# Altium PCB BMS PCB.PcbDoc (part 2 of 2)
Units mm, origin at the board's own origin, x right, y up, seen from the top; angles counter-clockwise.
Board outline 90 x 100 mm, 4 copper layers (Top Layer, Layer 1, Layer 2, Bottom Layer), stack 0.603 mm thick; 82 components, 43 nets, 216 pads, 71 vias.
Unrouted connection lines stored in the file: 2.
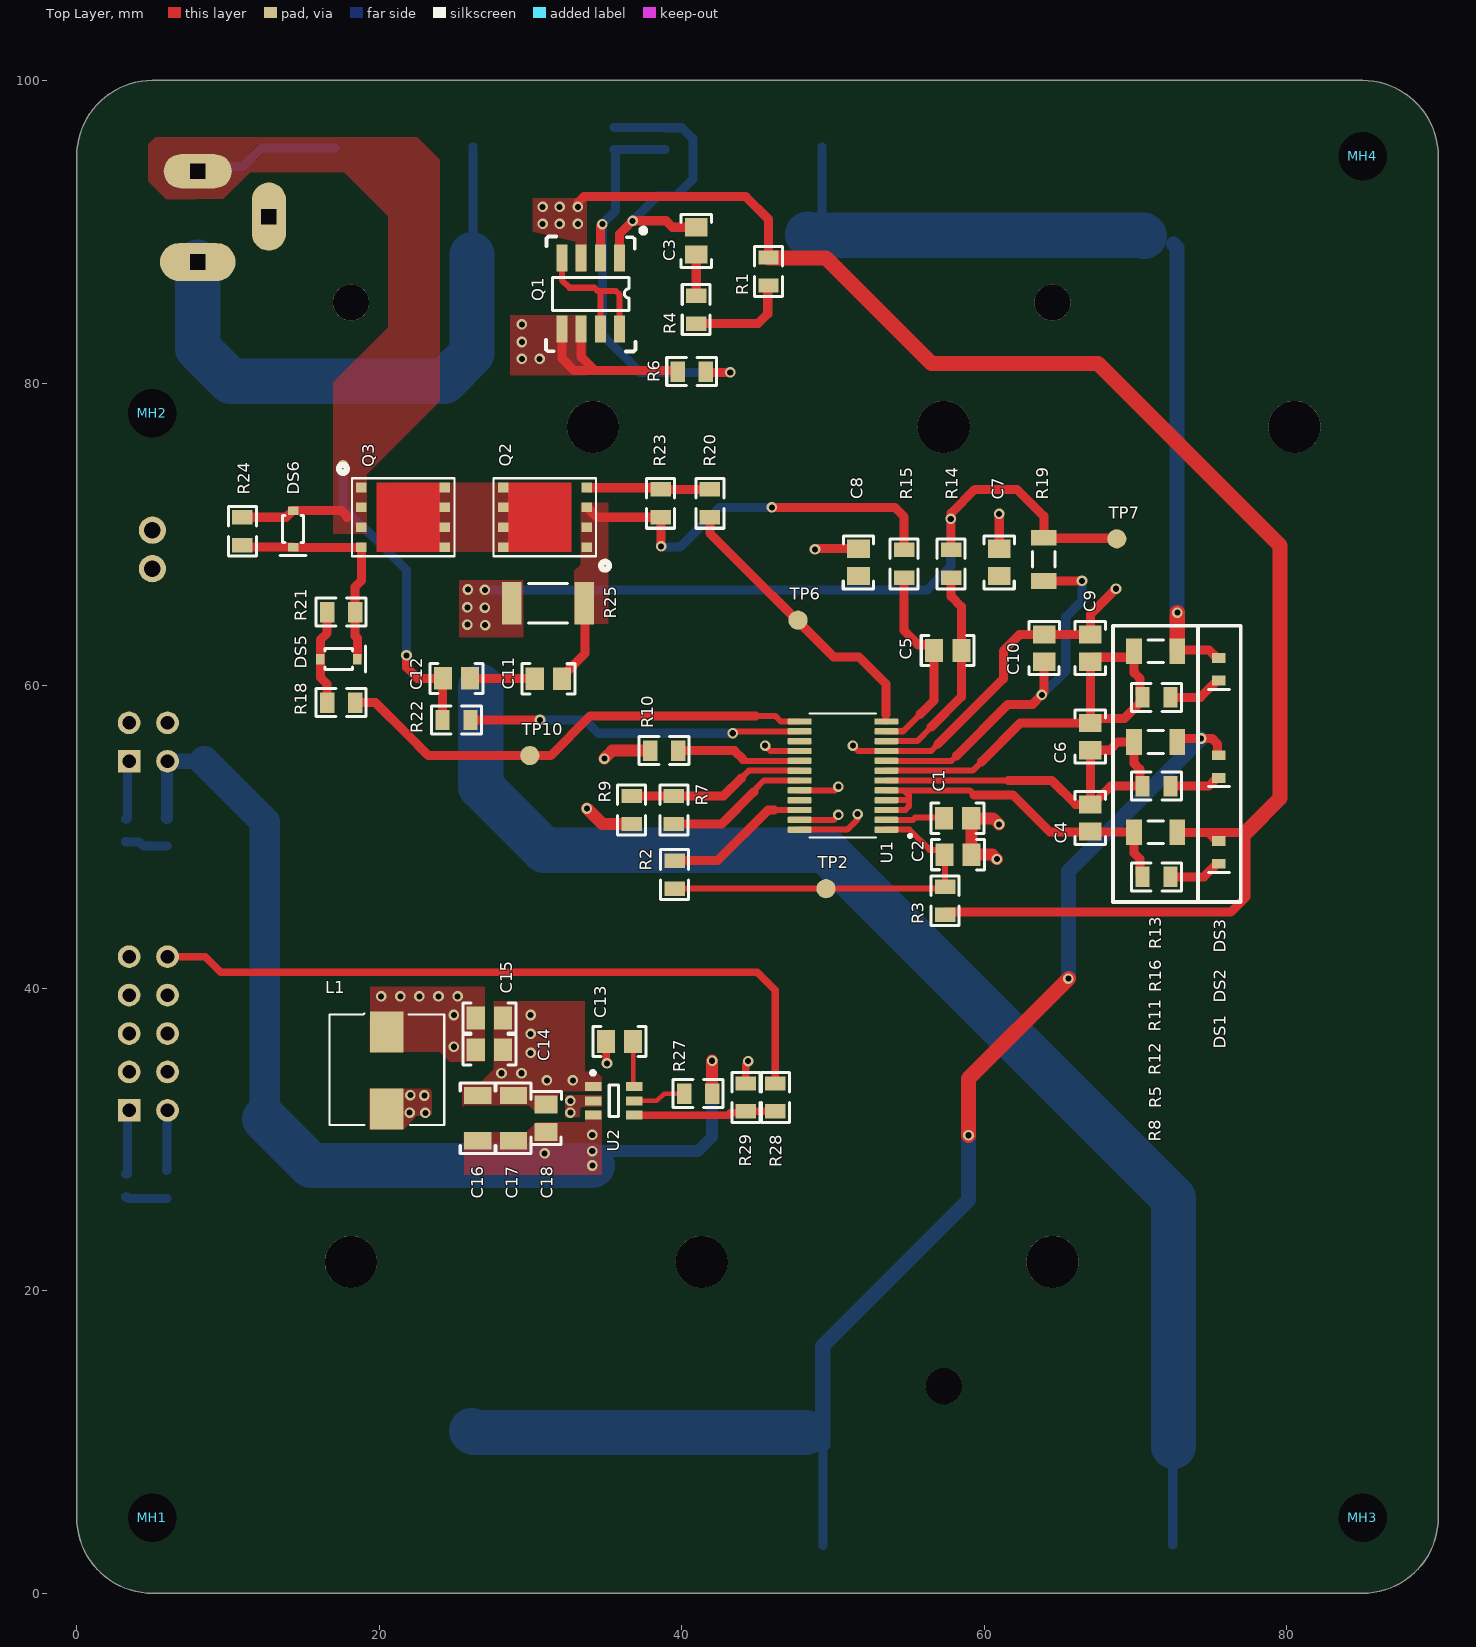
[diagram p0: Top Layer view]

## Part data (continued)
R14 R15: library part RES_100R_1/8W_1%_0805, "SMD Chip Resistor, 100 Ohm, ± 1%, 125 mW, 0805 [2012 Metric], Thick Film, General Purpose", Case Code (Imperial)=0805, Case Code (Metric)=2012, Manufacturer 1=Yageo, Manufacturer Part Number 1=RC0805FR-07100RL, Max Operating Temperature=155°C, Min Operating Temperature=-55°C, Package Quantity=5000, Power Rating=125mW, Supplier Part Number 1=311-100CRCT-ND, Temperature Coefficient=100ppm/°C, Tolerance=1%, Voltage Rating=150V, Application(s)="HIGH RELIABILITY", Category="Chip SMD Resistors", ComponentLink1Description=https://datasheet.ciiva.com/11808/0900766b8106beab-11808877.pdf?src-supplier=Rs, ComponentLink1URL=https://datasheet.ciiva.com/11808/0900766b8106beab-11808877.pdf?src-supplier=Rs, ComponentLink2Description=https://datasheet.ciiva.com/7941/1697719-7941680.pdf?src-supplier=Element14, ComponentLink2URL=https://datasheet.ciiva.com/7941/1697719-7941680.pdf?src-supplier=Element14, ComponentLink3Description=https://datasheet.ciiva.com/7941/1686128-7941679.pdf?src-supplier=Element14, ComponentLink3URL=https://datasheet.ciiva.com/7941/1686128-7941679.pdf?src-supplier=Element14, ComponentLink4Description=https://datasheet.ciiva.com/7660/38627-7660797.pdf?src-supplier=Element14, ComponentLink4URL=https://datasheet.ciiva.com/7660/38627-7660797.pdf?src-supplier=Element14, ComponentLink5Description=https://datasheet.ciiva.com/22747/444164-22747535.pdf?src-supplier=Element14, ComponentLink5URL=https://datasheet.ciiva.com/22747/444164-22747535.pdf?src-supplier=Element14, ComponentLink6Description=https://datasheet.ciiva.com/46447/444164-46447562.pdf?src-supplier=Element14, ComponentLink6URL=https://datasheet.ciiva.com/46447/444164-46447562.pdf?src-supplier=Element14, ComponentLink7Description=https://datasheet.ciiva.com/2456/pyu-r-int-thick-7-2456988.pdf?src-supplier=Digi-Key, ComponentLink7URL=https://datasheet.ciiva.com/2456/pyu-r-int-thick-7-2456988.pdf?src-supplier=Digi-Key, ComponentLink8Description=https://datasheet.ciiva.com/2456/pyu-r-int-thick-7-2456989.pdf?src-supplier=Digi-Key, ComponentLink8URL=https://datasheet.ciiva.com/2456/pyu-r-int-thick-7-2456989.pdf?src-supplier=Digi-Key, ComponentLink9Description=https://datasheet.ciiva.com/2456/pyu-r-int-thick-7-2456987.pdf?src-supplier=Digi-Key, ComponentLink9URL=https://datasheet.ciiva.com/2456/pyu-r-int-thick-7-2456987.pdf?src-supplier=Digi-Key, ComponentLink10Description=https://datasheet.ciiva.com/17082/rc0805-17082697.pdf?src-supplier=Future+Electronics, ComponentLink10URL=https://datasheet.ciiva.com/17082/rc0805-17082697.pdf?src-supplier=Future+Electronics, Height=0.5mm, Lead Free="Lead Free", Length=2mm, Packaging="Cut Tape", Pricing 1="1=0.1, 10=0.024, 50=0.0152, 100=0.0127, 500=0.00866, 1000=0.00748 (USD)", Reach SVHC Compliant=4187SVHC, Resistance=100R, RoHS=Yes, RoHS Compliant=Yes, Series=RC, Stock 1=1802567, Supplier 1=Digi-Key, Technology="THICK FILM", Termination=SMD/SMT, Type="General Purpose", Voltage Rating (AC)=150V, Weight=0.000917oz, Width=1.25mm
R18 R20: library part RES_5.1K_1/8W_1%_0805, "SMD Chip Resistor, 5.1 kOhm, ± 1%, 125 mW, 0805 [2012 Metric], Thick Film, General Purpose", Case Code (Imperial)=0805, Case Code (Metric)=2012, Manufacturer 1=Yageo, Manufacturer Part Number 1=RC0805FR-075K1L, Max Operating Temperature=155°C, Max Power Dissipation=125mW, Min Operating Temperature=-55°C, Package Quantity=1, Resistance=5.1kR, Supplier Part Number 1=311-5.10KCRCT-ND, Temperature Coefficient=100ppm/°C, Tolerance=1%, Voltage Rating=150V, Case/Package=0805, Category="Chip SMD Resistors", ComponentLink1Description=https://datasheet.ciiva.com/11808/0900766b8106beab-11808171.pdf?src-supplier=Rs, ComponentLink1URL=https://datasheet.ciiva.com/11808/0900766b8106beab-11808171.pdf?src-supplier=Rs, ComponentLink2Description=https://datasheet.ciiva.com/2456/pyu-r-int-thick-7-2456979.pdf?src-supplier=Digi-Key, ComponentLink2URL=https://datasheet.ciiva.com/2456/pyu-r-int-thick-7-2456979.pdf?src-supplier=Digi-Key, ComponentLink3Description=https://datasheet.ciiva.com/2456/pyu-r-int-thick-7-2456980.pdf?src-supplier=Digi-Key, ComponentLink3URL=https://datasheet.ciiva.com/2456/pyu-r-int-thick-7-2456980.pdf?src-supplier=Digi-Key, ComponentLink4Description=https://datasheet.ciiva.com/2456/pyu-r-int-thick-7-2456978.pdf?src-supplier=Digi-Key, ComponentLink4URL=https://datasheet.ciiva.com/2456/pyu-r-int-thick-7-2456978.pdf?src-supplier=Digi-Key, ComponentLink5Description=https://datasheet.ciiva.com/5558/rc0805-5558152.pdf?src-supplier=Mouser, ComponentLink5URL=https://datasheet.ciiva.com/5558/rc0805-5558152.pdf?src-supplier=Mouser, Construction=Rectangular, Depth=1.25mm, Features="Moisture Resistant", Height=0.024inch, Lead Free="Lead Free", Length=0.079inch, Military Standard=Not, Mount="Surface Mount", Number of Terminations=2, Packaging="Tape and Reel", Power Rating=125mW, Pricing 1="1=0.1, 10=0.024, 50=0.0152, 100=0.0127, 500=0.00866, 1000=0.00748 (USD)", RoHS=Yes, RoHS Compliant=Yes, Series=RC, Stock 1=497934, Supplier 1=Digi-Key, Technology="THICK FILM", Termination=SMD/SMT, Voltage Rating (DC)=150V, Width=0.049inch
R21: library part RES_1M_1/8W_1%_0805, "SMD Chip Resistor, 1 MOhm, ± 1%, 125 mW, 0805 [2012 Metric], Thick Film, General Purpose", Manufacturer 1=Yageo, Manufacturer Part Number 1=RC0805FR-131ML, Supplier Part Number 1=13-RC0805FR-131MLCT-ND, Category="Chip SMD Resistors", ComponentLink1Description=https://datasheet.ciiva.com/17332/rc0805-17332618.pdf?src-supplier=Future+Electronics, ComponentLink1URL=https://datasheet.ciiva.com/17332/rc0805-17332618.pdf?src-supplier=Future+Electronics, ComponentLink2Description=https://datasheet.ciiva.com/12560/rc0805-257173-12560472.pdf?src-supplier=Mouser, ComponentLink2URL=https://datasheet.ciiva.com/12560/rc0805-257173-12560472.pdf?src-supplier=Mouser, Pricing 1="1=0.1, 10=0.024, 50=0.0152, 100=0.0127, 500=0.00866, 1000=0.00748, 5000=0.00548, 10000=0.00486 (USD)", RoHS=Yes, Stock 1=50925, Supplier 1=Digi-Key
R22: library part RES_470K_1/8W_5%_0805, "SMD Chip Resistor, 470 kOhm, ± 5%, 125 mW, 0805 [2012 Metric], Thick Film, General Purpose", Manufacturer 1=Yageo, Manufacturer Part Number 1=RC0805JR-07470KL, Supplier Part Number 1=311-470KARCT-ND, Voltage Rating (AC)=150V, Category="Chip SMD Resistors", ComponentLink1Description=https://datasheet.ciiva.com/7941/442941-7941963.pdf?src-supplier=Element14, ComponentLink1URL=https://datasheet.ciiva.com/7941/442941-7941963.pdf?src-supplier=Element14, ComponentLink2Description=https://datasheet.ciiva.com/7941/442941-7941964.pdf?src-supplier=Element14, ComponentLink2URL=https://datasheet.ciiva.com/7941/442941-7941964.pdf?src-supplier=Element14, ComponentLink3Description=https://datasheet.ciiva.com/16747/rc0805-16747222.pdf?src-supplier=Future+Electronics, ComponentLink3URL=https://datasheet.ciiva.com/16747/rc0805-16747222.pdf?src-supplier=Future+Electronics, ComponentLink4Description=https://datasheet.ciiva.com/15190/getdatasheetpartid-323887-15190053.pdf?src-supplier=Verical, ComponentLink4URL=https://datasheet.ciiva.com/15190/getdatasheetpartid-323887-15190053.pdf?src-supplier=Verical, ComponentLink5Description=https://datasheet.ciiva.com/2456/pyu-r-int-thick-7-2456113.pdf?src-supplier=Digi-Key, ComponentLink5URL=https://datasheet.ciiva.com/2456/pyu-r-int-thick-7-2456113.pdf?src-supplier=Digi-Key, ComponentLink6Description=https://datasheet.ciiva.com/2456/pyu-r-int-thick-7-2456114.pdf?src-supplier=Digi-Key, ComponentLink6URL=https://datasheet.ciiva.com/2456/pyu-r-int-thick-7-2456114.pdf?src-supplier=Digi-Key, ComponentLink7Description=https://datasheet.ciiva.com/2456/pyu-r-int-thick-7-2456115.pdf?src-supplier=Digi-Key, ComponentLink7URL=https://datasheet.ciiva.com/2456/pyu-r-int-thick-7-2456115.pdf?src-supplier=Digi-Key, Pricing 1="1=0.1, 10=0.022, 50=0.0136, 100=0.0114, 500=0.00778, 1000=0.00671 (USD)", RoHS=Yes, Stock 1=141801, Supplier 1=Digi-Key
R23: library part RES_10M_1/8W_5%_0805, "Res Thick Film 0805 10M Ohm 5% 0.125W(1/8W) ±100ppm/°C Pad SMD T/R", Manufacturer 1=Yageo, Manufacturer Part Number 1=RC0805JR-0710ML, Supplier Part Number 1=311-10MARCT-ND, Voltage Rating (AC)=150V, Category="Chip SMD Resistors", ComponentLink1Description=https://datasheet.ciiva.com/12667/rc0805-12667352.pdf?src-supplier=Mouser, ComponentLink1URL=https://datasheet.ciiva.com/12667/rc0805-12667352.pdf?src-supplier=Mouser, ComponentLink2Description=https://datasheet.ciiva.com/2456/pyu-r-int-thick-7-2456140.pdf?src-supplier=Digi-Key, ComponentLink2URL=https://datasheet.ciiva.com/2456/pyu-r-int-thick-7-2456140.pdf?src-supplier=Digi-Key, ComponentLink3Description=https://datasheet.ciiva.com/2456/pyu-r-int-thick-7-2456141.pdf?src-supplier=Digi-Key, ComponentLink3URL=https://datasheet.ciiva.com/2456/pyu-r-int-thick-7-2456141.pdf?src-supplier=Digi-Key, ComponentLink4Description=https://datasheet.ciiva.com/2456/pyu-r-int-thick-7-2456142.pdf?src-supplier=Digi-Key, ComponentLink4URL=https://datasheet.ciiva.com/2456/pyu-r-int-thick-7-2456142.pdf?src-supplier=Digi-Key, Pricing 1="1=0.1, 10=0.022, 50=0.0136, 100=0.0114, 500=0.00778, 1000=0.00671 (USD)", RoHS=Yes, Stock 1=64611, Supplier 1=Digi-Key
R24: library part RES_3M_1/8W_5%_0805, "Res Thick Film 0805 3M Ohm 5% 1/8W ±100ppm/°C SMD Paper T/R", Manufacturer 1=Yageo, Manufacturer Part Number 1=RC0805JR-073ML, Supplier Part Number 1=311-3.0MARCT-ND, Category="Chip SMD Resistors", ComponentLink1Description=https://datasheet.ciiva.com/2491/pyu-r-int-thick-7-2491360.pdf?src-supplier=Digi-Key, ComponentLink1URL=https://datasheet.ciiva.com/2491/pyu-r-int-thick-7-2491360.pdf?src-supplier=Digi-Key, ComponentLink2Description=https://datasheet.ciiva.com/2491/pyu-r-int-thick-7-2491361.pdf?src-supplier=Digi-Key, ComponentLink2URL=https://datasheet.ciiva.com/2491/pyu-r-int-thick-7-2491361.pdf?src-supplier=Digi-Key, ComponentLink3Description=https://datasheet.ciiva.com/2491/pyu-r-int-thick-7-2491362.pdf?src-supplier=Digi-Key, ComponentLink3URL=https://datasheet.ciiva.com/2491/pyu-r-int-thick-7-2491362.pdf?src-supplier=Digi-Key, ComponentLink4Description=https://datasheet.ciiva.com/17422/rc0805-17422951.pdf?src-supplier=Future+Electronics, ComponentLink4URL=https://datasheet.ciiva.com/17422/rc0805-17422951.pdf?src-supplier=Future+Electronics, Pricing 1="1=0.1, 10=0.022, 50=0.0136, 100=0.0114, 500=0.00778, 1000=0.00671 (USD)", RoHS=Yes, Stock 1=79661, Supplier 1=Digi-Key
R25: library part RES_0.01R_1/2W_1%_2010, "SMD Current Sense Resistor, 10 Milliohm, ± 1%, 500 mW, 2010 [5025 Metric], Metal Film", Manufacturer 1=Yageo, Manufacturer Part Number 1=PE2010FKE070R01L, Supplier Part Number 1=13-PE2010FKE070R01LCT-ND, Category="Chip SMD Resistors", ComponentLink1Description=http://www.mouser.com/ds/2/447/PYu-PE_521_RoHS_L_5-1077989.pdf?src-supplier=Mouser, ComponentLink1URL=http://www.mouser.com/ds/2/447/PYu-PE_521_RoHS_L_5-1077989.pdf?src-supplier=Mouser, ComponentLink2Description=http://www.yageo.com/documents/recent/PYu-PE_521_RoHS_L_5.pdf?src-supplier=Digi-Key, ComponentLink2URL=http://www.yageo.com/documents/recent/PYu-PE_521_RoHS_L_5.pdf?src-supplier=Digi-Key, Pricing 1="1=0.62, 10=0.458, 25=0.372, 50=0.3236, 100=0.2669, 250=0.23184, 500=0.18872, 1000=0.14968 (USD)", RoHS=Yes, Stock 1=12447, Supplier 1=Digi-Key
R28: library part RES_54.9K_1/8W_1%_0805, "Res Thick Film 0805 54.9K Ohm 1% 1/8W ±100ppm/°C Molded SMD Punched Carrier T/R", Manufacturer 1=Panasonic, Manufacturer Part Number 1=ERJ-6ENF5492V, Supplier Part Number 1=P54.9KCDKR-ND, Category="Chip SMD Resistors", ComponentLink1Description=https://datasheet.ciiva.com/9188/aoa0000ce2-9188791.pdf?src-supplier=Avnet, ComponentLink1URL=https://datasheet.ciiva.com/9188/aoa0000ce2-9188791.pdf?src-supplier=Avnet, ComponentLink2Description=https://datasheet.ciiva.com/24068/aoa0000ce2-24068921.pdf?src-supplier=Mouser, ComponentLink2URL=https://datasheet.ciiva.com/24068/aoa0000ce2-24068921.pdf?src-supplier=Mouser, ComponentLink3Description=https://datasheet.ciiva.com/46420/1678782-46420313.pdf?src-supplier=Element14, ComponentLink3URL=https://datasheet.ciiva.com/46420/1678782-46420313.pdf?src-supplier=Element14, ComponentLink4Description=https://datasheet.ciiva.com/28563/1694929-28563629.pdf?src-supplier=Element14, ComponentLink4URL=https://datasheet.ciiva.com/28563/1694929-28563629.pdf?src-supplier=Element14, Pricing 1="1=0.11, 10=0.052, 50=0.0338, 100=0.0287, 500=0.02018, 1000=0.01757 (USD)", RoHS=Yes, Stock 1=98253, Supplier 1=Digi-Key
SW1: library part SW_SPST_NO_EVP-AA602W_SMT, "SWITCH TACTILE SPST-NO 0.02A 15V", Manufacturer=Panasonic, Category="Tactile Switches", ComponentLink1Description=https://datasheet.ciiva.com/30071/atk0000ce26-30071612.pdf?src-supplier=Onlinecomponents.com, ComponentLink1URL=https://datasheet.ciiva.com/30071/atk0000ce26-30071612.pdf?src-supplier=Onlinecomponents.com, ComponentLink2Description=https://datasheet.ciiva.com/16212/atk0000ce26-16212136.pdf?src-supplier=Future+Electronics, ComponentLink2URL=https://datasheet.ciiva.com/16212/atk0000ce26-16212136.pdf?src-supplier=Future+Electronics, ComponentLink3Description=https://datasheet.ciiva.com/2899/atk0000ce26-2899984.pdf?src-supplier=Digi-Key, ComponentLink3URL=https://datasheet.ciiva.com/2899/atk0000ce26-2899984.pdf?src-supplier=Digi-Key, ComponentLink4Description=https://datasheet.ciiva.com/2899/atk0000ce26-2899985.pdf?src-supplier=Digi-Key, ComponentLink4URL=https://datasheet.ciiva.com/2899/atk0000ce26-2899985.pdf?src-supplier=Digi-Key, ComponentLink5Description=https://datasheet.ciiva.com/2899/atk0000ce26-2899986.pdf?src-supplier=Digi-Key, ComponentLink5URL=https://datasheet.ciiva.com/2899/atk0000ce26-2899986.pdf?src-supplier=Digi-Key, ComponentLink6Description=https://datasheet.ciiva.com/25603/0900766b810ad3e5-25603922.pdf?src-supplier=Rs, ComponentLink6URL=https://datasheet.ciiva.com/25603/0900766b810ad3e5-25603922.pdf?src-supplier=Rs, ComponentLink7Description=https://datasheet.ciiva.com/8166/atk0000ce26-8166426.pdf?src-supplier=Avnet, ComponentLink7URL=https://datasheet.ciiva.com/8166/atk0000ce26-8166426.pdf?src-supplier=Avnet, Manufacturer 2=Panasonic, Manufacturer Part Number=EVP-AA602W, Manufacturer Part Number 2=EVP-AA602W, Pricing 1="1=0.86, 10=0.818, 50=0.802, 100=0.682, 1000=0.498, 10000=0.461 (USD)", Pricing 2="1=0.79, 10=0.759, 25=0.7296, 100=0.6334, 250=0.57796, 500=0.53708, 1000=0.48162, 2500=0.45243 (USD)", RoHS=Yes, Stock 1=3156, Stock 2=74087, Supplier 1=Mouser, Supplier 2=Digi-Key, Supplier Part Number 2=10-EVP-AA602WCT-ND
TP1 TP2 TP3 TP4 TP5 TP6 TP7 TP8 TP9 TP10: "Testpoint SMD Round"
U1: library part IC_BMS_3S_BQ77915_24TSSOP, "Battery Protection Li-Ion/Li-Polymer 1mA 0V to 25V 24-Pin TSSOP T/R", Manufacturer 1="Texas Instruments", Supplier Part Number 1=296-50995-1-ND, Category="Battery Management", ComponentLink1Description=http://www.ti.com/lit/ds/symlink/bq77915.pdf?src-supplier=Digi-Key, ComponentLink1URL=http://www.ti.com/lit/ds/symlink/bq77915.pdf?src-supplier=Digi-Key, ComponentLink2Description=http://www.ti.com/general/docs/suppproductinfo.tsp?distId=10&amp;gotoUrl=http%3A%2F%2Fwww.ti.com%2Flit%2Fgpn%2Fbq77915&src-supplier=Digi-Key, ComponentLink2URL=http://www.ti.com/general/docs/suppproductinfo.tsp?distId=10&amp;gotoUrl=http%3A%2F%2Fwww.ti.com%2Flit%2Fgpn%2Fbq77915&src-supplier=Digi-Key, Manufacturer Part Number 1=BQ7791500PWR, Pricing 1="1=1.72, 10=1.547, 25=1.4596, 100=1.2435, 250=1.16756, 500=1.02162, 1000=0.84648 (USD)", RoHS=Yes, Stock 1=2285, Supplier 1=Digi-Key
U2: library part REG_ADJ-0.768V-7V_2A_SOT23-6, "IC REG BUCK ADJ 2A SYNC SOT6", Case/Package=SOT-23-6, Manufacturer 1="Texas Instruments", Max Input Voltage=17V, Max Operating Temperature=125°C, Max Output Voltage=7V, Min Input Voltage=4.5V, Min Operating Temperature=-40°C, Min Output Voltage=768mV, Output Current=2A, Quiescent Current=400uA, Supplier Part Number 1=296-44397-1-ND, Switching Frequency=580kHz, Category="Voltage Regulators - Switching", ComponentLink1Description=http://www.ti.com/lit/ds/symlink/tps562201.pdf?src-supplier=Digi-Key, ComponentLink1URL=http://www.ti.com/lit/ds/symlink/tps562201.pdf?src-supplier=Digi-Key, ComponentLink2Description=http://www.ti.com/lit/gpn/tps562201?src-supplier=Mouser, ComponentLink2URL=http://www.ti.com/lit/gpn/tps562201?src-supplier=Mouser, Lead Free="Lead Free", Manufacturer Part Number 1=TPS562201DDCR, Mount="Surface Mount", Number of Outputs=1, Number of Pins=6, Output Configuration=Positive, Output Type=Adjustable, Packaging="Cut Tape", Pricing 1="1=0.39, 10=0.318, 25=0.2908, 100=0.2165, 250=0.19624, 500=0.1624, 1000=0.12181 (USD)", RoHS=Yes, RoHS Compliant=Yes, Series="D-CAP2™, Eco-Mode™", Stock 1=86271, Supplier 1=Digi-Key, Synchronous Rectifier=Yes

## Via types
v1: diameter 0.7, hole 0.4, Top Layer to Bottom Layer, 71 vias

## Nets (pads, with @x,y where several pads share a name; then routed paths per layer and width w, separated by ;. In a path a pad name is that pad's centre, name@x,y a point inside that pad or via, vN(x,y) a via of type N, cw(c..) or ccw(c..) an arc to the next point about the centre after c; other vN are vias at no path point)
"+5V Out": C14.2 C15.2 L1.1 P1.2 P1.4 P1.6 P1.8 P1.10 R26.1 R28.2 | length 51.2
  Top Layer w0.5: P1.10 8.495,42.08 9.525,41.05 44.975,41.05 46.175,39.85 R28.2
  Bottom Layer w0.6: R26.1 5.975,27.975 5.975,31.895 P1.2
  other v1: 24.925,36.125 24.925,38.225 20.125,39.45 21.387,39.45 22.65,39.45 23.912,39.45 25.175,39.45
GND: C1.1 C2.2 C7.1 C8.1 C9.1 C10.1 R9.2 R10.2 U1.9 U1.16 U1.20 U1.23 U1.24 | length 54.2
  Top Layer w0.4: v1(45.5,56.025) 45.85,55.675 U1.16 ; U1.24 50.925,50.475 51.625,51.175 v1(51.625,51.5) ; U1.23 50.05,51.125 v1@50.375,51.45 ; U1.20 50.125,53.075 v1@50.35,53.3 ; v1(51.3,56.025) 51.65,55.675 U1.9 54.922,55.675 54.926,55.67 56.47,55.67 56.925,56.125
  Top Layer w0.6: v1(48.8,69) 48.85,69.05 C8.1 ; 56.925,56.125 61.25,60.45 61.25,62.3 62.325,63.375 C10.1 C9.1 67,64.7 v1(68.7,66.4) ; v1(60.975,71.35) 60.978,71.347 C7.1
  Top Layer w0.8: v1(33.725,51.875) 34.75,50.85 R9.2 ; v1@34.875,55.175 35.4,55.7 R10.2 ; v1(60.825,48.525) 60.525,48.825 C2.2 59.137,48.837 59.137,51.213 C1.1 60.575,51.225 v1(60.975,50.825)
  other v1: 50.35,51.45 50.35,53.325 34.875,55.175
NetC1_2: C1.2 U1.2 | length 3.9
  Top Layer w0.4: U1.2 55.275,51.125 55.425,51.275 57.275,51.275 C1.2
NetC2_1: C2.1 R2.2 R3.2 TP2.1 U1.1 | length 24.7
  Top Layer w0.4: R2.2 TP2.1 57.4,46.575 57.4,48.825 57.084,49.141 56.384,49.141 55.05,50.475 U1.1
NetC3_2: C3.2 R4.1 | length 2.7
  Top Layer w0.6: R4.1 C3.2
NetC4_1: C4.1 C6.2 R11.2 R12.2 U1.6 | length 27.9
  Top Layer w0.4: U1.6 61.6,53.725
  Top Layer w0.6: 61.6,53.725 64.45,53.725 66.025,52.15 C4.1 ; C4.1 67.15,52.15 68.35,53.35 R12.2 70.275,53.525 70.275,54.475 69.9,54.85 R11.2 68.825,56.275 68.275,55.725 C6.2 C4.1
NetC4_2: C4.2 R5.2 R8.2 U1.3 U1.4 U1.5 | length 25
  Top Layer w0.4: U1.3 54.766,51.775 55,52.009 55,52.38 ; U1.4 54.955,52.425 55,52.38 ; U1.5 54.675,53.075 ; 59.325,52.775 59.025,53.075 54.675,53.075 ; 54.675,53.075 55,52.75 55,52.38
  Top Layer w0.6: 59.325,52.775 61.875,52.775 64.325,50.325 67.025,50.325 69.875,50.325 R5.2 69.9,48.925 70.275,48.55 70.275,47.525 R8.2
NetC5_1: C5.1 C8.2 R15.2 U1.11 | length 14.6
  Top Layer w0.4: 54.625,56.975 U1.11 53.525,56.98 54.63,56.98 55.755,58.105
  Top Layer w0.6: C8.2 C8.2@51.738,67.187 ; R15.2 54.695,63.63 55.626,62.699 56.375,62.699 56.675,62.399 56.675,59.025 55.755,58.105
NetC5_2: C5.2 C7.2 R14.2 U1.10 | length 14.5
  Top Layer w0.4: U1.10 53.522,56.323 55.548,56.323 56.487,57.263 ; C7.2@60.852,67.123 C7.2
  Top Layer w0.6: 56.487,57.263 58.475,59.25 C5.2 58.475,65.225 57.796,65.904 R14.2
NetC6_1: C6.1 C9.2 R13.2 R16.2 U1.7 | length 29.4
  Top Layer w0.4: U1.7 59.225,54.375 59.813,54.963
  Top Layer w0.6: 59.813,54.963 62.375,57.525 C6.1 ; R13.2 R13.2@69.9,61.95 ; C6.1 67.3,57.825 69.25,57.825 70.45,59.025 R16.2 70.275,59.4 70.275,60.475 69.9,60.85 R13.2@69.9,61.95 ; C6.1 C9.2 67.3,61.875 69.825,61.875 R13.2@69.9,61.95
NetC10_2: C10.2 R19.2 U1.8 | length 25.5
  Top Layer w0.4: U1.8 55.424,55.025 55.426,55.023 57.823,55.023 58.162,55.363
  Top Layer w0.6: 58.162,55.363 61.55,58.75 63.165,58.75 v1(63.8,59.385) 63.8,59.412 63.95,59.562 C10.2 ; R19.2 v1(66.45,66.925)
  Bottom Layer w0.6: v1(63.8,59.385) 65.375,60.96 65.375,64.525 66.45,65.6 v1(66.45,66.925)
NetC11_1: C11.1 C12.2 | length 4.3
  Top Layer w0.6: C12.2 26.012,60.463 30.262,60.463 C11.1
NetC11_2: C11.2 Q2.1 Q2.2 Q2.3 R15.1 R23.1 R25.2 | length 32.4
  Top Layer w0.6: C11.2 32.075,60.6 33.6,62.125 33.6,65.4 R25.2 ; Q2.3 33.727,71.785 34.388,71.125 38.45,71.125 38.525,71.05 R23.1 38.613,71.112 38.613,69.212 v1(38.625,69.2) ; v1(45.95,71.775) 54.075,71.775 54.695,71.155 R15.1
  Bottom Layer w0.6: v1(38.625,69.2) 38.675,69.15 39.875,69.15 42.5,71.775 v1(45.95,71.775)
NetC13_1: C13.1 L1.2 U2.2 | length 1.5
  Top Layer w0.5: C13.1 35.013,36.438 35.013,35.063 v1(35.05,35.025)
  other v1: 23.05,31.75 22,31.775 32.629,31.767 32.629,32.542 22.975,32.9 22.05,32.925
NetC13_2: C13.2 U2.6 | length 3
  Top Layer w0.3: C13.2 36.775,33.575 U2.6
NetCON3_2: CON3.2 CON4.1 DS2.1 R11.1 TP4.1 | length 90.8
  Top Layer w0.6: R11.1 72.975,56.5 75.05,56.5 75.401,56.149 75.401,55.425 75.426,55.4 DS2.1
  Top Layer w1: v1(58.95,30.275) 58.95,34.025 v1(65.55,40.625)
  Bottom Layer w0.6: CON4.1@48.201,10.622 49.325,9.498 TP4.1
  Bottom Layer w1: CON4.1 49.312,16.338 58.95,25.975 v1(58.95,30.275) ; v1(65.55,40.625) 65.55,47.725 v1(74.325,56.5)
  Bottom Layer w3: CON3.2@26.103,10.749 26.23,10.622 CON4.1@48.201,10.622
NetCON4_2: CON4.2 CON5.1 DS3.1 R13.1 TP5.1 | length 58.4
  Top Layer w0.6: R13.1 72.825,62.35 74.85,62.35 75.375,61.825 DS3.1
  Top Layer w1: R13.1 v1(72.75,64.825)
  Bottom Layer w0.6: CON4.2@48.328,89.835 49.25,90.757 TP5.1
  Bottom Layer w1: CON5.1 72.725,88.945 72.725,64.85 v1(72.75,64.825)
  Bottom Layer w3: CON4.2@48.328,89.835 48.391,89.771 70.49,89.771 CON5.1@70.553,89.708
NetCON5_2: CON5.2 R14.1 R19.1 R25.1 TP7.1 TP8.1 | length 137.6
  Top Layer w0.6: R14.1 57.796,71.404 59.367,72.975 62.15,72.975 63.925,71.2 R19.1 63.962,69.737 68.713,69.737 TP7.1
  Bottom Layer w0.6: v1(26.975,66.325) 56.225,66.325 57.775,67.875 v1(57.775,71.025) ; TP8.1 72.45,9.78 CON5.2
  Bottom Layer w3: 26.7,59.933 26.7,53.325 30.9,49.125 49.482,49.125 65.522,33.085 72.5,26.107 CON5.2@72.5,9.703
  other v1: 27,64 25.825,64.025 26.975,65.15 25.825,65.175 25.85,66.35
NetDS1_2: DS1.2 R8.1 | length 3.6
  Top Layer w0.6: R8.1 74.5,47.35 75.375,48.225 DS1.2
NetDS2_2: DS2.2 R12.1 | length 3.4
  Top Layer w0.6: R12.1 74.825,53.35 75.375,53.9 DS2.2
NetDS3_2: DS3.2 R16.1 | length 3.7
  Top Layer w0.6: R16.1 74.275,59.225 75.375,60.325 DS3.2
NetDS4_1: DS4.1 R17.1 | length 2.8
  Bottom Layer w0.6: DS4.1 3.25,49.65 4.15,49.65 4.4,49.4 R17.1
NetDS5_1: DS5.1 R18.1 R21.2 | length 6.3
  Top Layer w0.6: R18.1 16.548,60.102 16.105,60.545 DS5.1 16.105,63.03 16.548,63.473 R21.2
NetDS5_2: DS5.2 DS6.2 Q3.4 R21.1 R24.2 | length 15.6
  Top Layer w0.6: R24.2 11.077,69.15 14.28,69.15 DS6.2 14.307,69.137 18.81,69.137 Q3.4 18.817,66.942 18.398,66.523 R21.1 18.398,63.277 18.545,63.13 DS5.2
NetDS7_1: DS7.1 R26.2 | length 2.8
  Bottom Layer w0.6: DS7.1 3.35,26.2 3.45,26.1 R26.2
NetQ1_2: Q1.2 R6.1 SW1.1 SW1.1' | length 29.4
  Top Layer w0.6: Q1.2 34.61,90.333 34.75,90.473 v1(34.75,90.5) ; R6.1 41.625,80.7 v1(43.2,80.7)
  Bottom Layer w0.6: SW1.1' SW1.1 35.625,95.35 35.625,91.393 34.75,90.518 v1(34.75,90.5) 34.75,83.2 37.25,80.7 v1(43.2,80.7)
NetQ1_4: Q1.4 Q1.7 Q1.8 | length 10.3
  Top Layer w0.4: Q1.4 32.07,86.805 32.575,86.3 34.225,86.3 34.45,86.075 35.646,86.075 35.88,85.841 Q1.8 ; Q1.7 34.61,85.915
NetQ2_4: Q2.4 R20.1 R23.2 | length 8.2
  Top Layer w0.6: Q2.4 33.727,73.08 38.495,73.08 R23.2 R20.1
NetQ2_5,6,7,8: Q2.5 Q2.6 Q2.7 Q2.8 Q3.5 Q3.6 Q3.7 Q3.8
NetR1_1: R1.1 R4.2 | length 6.9
  Top Layer w0.6: R4.2 45.025,83.925 45.675,84.575 45.675,86.4 R1.1
NetR2_1: R2.1 U1.22 | length 9.6
  Top Layer w0.4: 46.1,51.775 U1.22
  Top Layer w0.6: R2.1 42.35,48.425 45.7,51.775 46.1,51.775
NetR7_1: R7.1 U1.19 | length 9.5
  Top Layer w0.4: 44.75,53.05 45.425,53.725 U1.19
  Top Layer w0.6: R7.1 42.625,50.85 44.75,52.975
NetR7_2: R7.2 R9.1 U1.18 | length 11.8
  Top Layer w0.4: 43.925,53.875 44.425,54.375 U1.18
  Top Layer w0.6: R9.1 R7.2 42.75,52.7 43.925,53.875
NetR10_1: R10.1 U1.17 | length 8.3
  Top Layer w0.4: 44.05,55.125 44.15,55.025 U1.17
  Top Layer w0.6: R10.1 43.475,55.7 44.05,55.125
NetR18_2: R18.2 TP10.1 U1.13 | length 32.1
  Top Layer w0.4: 44.875,58 46.175,58 46.55,57.625 U1.13
  Top Layer w0.6: R18.2 19.75,58.875 21.85,56.775 23.25,55.375 31.325,55.375 33.95,58 44.875,58
NetR20_2: R20.2 TP6.1 U1.12 | length 19.3
  Top Layer w0.4: 53.475,58.075 53.475,57.63 53.48,57.625 U1.12
  Top Layer w0.6: R20.2 41.85,70.075 50.025,61.9 51.7,61.9 53.5,60.1 53.5,58.1
NetR22_2: R22.2 U1.14 | length 22.2
  Top Layer w0.4: v1(43.363,56.849) 43.445,56.849 43.57,56.975 U1.14
  Top Layer w0.6: R22.2 v1(30.625,57.725)
  Bottom Layer w0.6: v1(30.625,57.725) 33.6,57.725 34.475,56.85 v1@43.4,56.85
NetR27_2: R27.2 U2.5 | length 3.5
  Top Layer w0.3: U2.5 38.35,32.55 38.825,33.025 R27.2
NetR28_1: R28.1 R29.2 U2.4 | length 9.4
  Top Layer w0.5: U2.4 43.05,31.6 43.2,31.75 44.125,31.75 R29.2 R28.1
Out-: C3.1 C14.1 C15.1 C16.2 C17.2 C18.2 CON1.2 CON2.3 DS4.2 DS7.2 P1.1 P1.3 P1.5 P1.7 P1.9 P2.1 P2.3 Q1.1 R29.1 SW1.2 SW1.2' U2.1 | length 30.4
  Top Layer w0.5: R29.1 44.225,34.969 44.375,35.119 v1(44.375,35.173)
  Top Layer w0.6: Q1.1 35.88,89.855 v1(36.75,90.725) 38.95,90.725 39.375,90.3 C3.1
  Bottom Layer w0.6: DS7.2 3.317,27.7 3.343,27.725 3.343,31.802 P1.1 ; DS4.2 3.318,51.175 3.343,51.2 3.343,54.882 P2.1 ; SW1.2 SW1.2' 38.899,96.876 39.999,96.876 40.725,96.15 40.725,93.475 39.625,92.375 38.4,92.375 v1(36.75,90.725)
  other v1: 31.075,33.9 32.8,33.9 28.075,34.375 29.4,34.375 30,35.725 30,36.975 30,38.225
Pack+: CON2.1 CON3.1 DS1.1 Q1.3 R1.2 R3.1 R5.1 TP1.1 TP3.1 | length 147
  Top Layer w0.6: v1(33.125,91.65) 33.144,91.669 33.144,91.943 33.526,92.325 44.225,92.325 45.725,90.825 R1.2 ; R3.1@57.403,45.025 76.275,45.025 77.3,46.05 77.3,50.3 ; R5.1 74.8,50.3 ; DS1.1 75.375,49.725 74.8,50.3 ; 77.325,50.325 77.3,50.3 ; 74.8,50.3 77.3,50.3
  Top Layer w1: R1.2 45.75,88.275 49.525,88.275 56.5,81.3 67.5,81.3 79.55,69.25 79.55,52.55 77.325,50.325
  Bottom Layer w0.6: CON3.1@26.125,88.5 26.2,88.575 TP3.1
  Bottom Layer w3: CON2.1 8,82.3 10.175,80.125 24.3,80.125 26.125,81.95 CON3.1@26.125,88.5
  other v1: 30.8,90.525 31.925,90.525 33.125,90.525 30.8,91.65 31.925,91.65
Pack-: C12.1 CON2.2 DS6.1 Q3.1 Q3.2 Q3.3 R22.1 R24.1 TP9.1 | length 37.6
  Top Layer w0.6: R24.1 13.832,71.127 14.275,71.57 DS6.1 17.499,71.57 17.85,71.219 17.85,71.125 ; v1(21.8,62) 21.8,61.2 22.525,60.475 C12.1 24.188,60.463 24.188,57.737 R22.1
  Bottom Layer w0.6: CON2.2 8.316,94.316 10.991,94.316 12.2,95.525 TP9.1 ; v1(17.6,74.55) 17.6,71.825 21.8,67.625 v1(21.8,62)
PackOUT: C16.1 C17.1 C18.1 CON1.1 P2.2 P2.4 Q1.5 Q1.6 R6.2 R17.2 R27.1 U2.3 | length 83
  Top Layer w0.6: Q1.5 32.07,81.655 32.9,80.825 34.25,80.825 ; Q1.6 33.34,81.735 34.074,81.001 34.25,80.825 ; R6.2 39.55,80.825 34.25,80.825
  Top Layer w0.8: R27.1 v1(42,35.2)
  Bottom Layer w0.8: R17.2 5.975,51.275 5.975,54.975 P2.2 ; v1(34.075,29.225) 41.05,29.225 42,30.175 v1(42,35.2)
  Bottom Layer w1: P2.2 8.425,55
  Bottom Layer w2: 8.425,55 12.425,51 12.425,31.35
  Bottom Layer w3: 12.425,31.35 15.5,28.275 v1(34.088,28.275)
  other v1: 30.925,29.075 34.075,30.3 29.425,81.6 30.6,81.6 29.429,82.713 29.425,83.875
pads on no net: CON3. CON4. CON5. MH1.1 MH2.1 MH3.1 MH4.1 U1.15 U1.21

## Polygon pours and split planes (outlines as drawn)
Pack+ on Bottom Layer "NONET_L-01_P-001" (solid, pour order 15): 25.4,92.55 25.425,92.575 33.675,92.575 33.675,89.475 33.65,89.45 25.4,89.45
NetCON5_2 on Bottom Layer "NONET_L-01_P-001" (solid, pour order 13): 25.3,66.975 25.3,60.55 28.15,60.55 28.15,66.95
Pack+ on Bottom Layer "NONET_L-01_P-001" (solid, pour order 5): 6.45,84.925 5.15,86.225 5.15,89.925 10.1,89.925 10.9,89.125 10.9,86.3 9.475,84.875
NetC13_1 on Bottom Layer "NONET_L-01_P-001" (solid, pour order 3): 19.35,33.35 33.55,33.35 33.625,33.425 33.625,35.575 35.625,35.575 35.625,34.525 34.725,34.525 34.725,32.2 34,32.2 33.35,31.55 22.525,31.55 21.6,30.625 21.55,30.675 19.35,30.675
NetC13_1 on Top Layer "NETC13_1_L01_P017" (solid, pour order 17): 19.35,33.35 19.35,30.675 21.55,30.675 21.575,30.65 22.475,31.55 23.35,31.55 23.475,31.675 23.475,33.2 23.325,33.35
PackOUT on Top Layer "PACKOUT_L01_P016" (solid, pour order 16): 31.75,84.475 33.675,84.475 33.675,80.525 28.65,80.525 28.65,84.475
Pack+ on Top Layer "NONET_L-01_P-001" (solid, pour order 14): 33.7,87.4 32.975,87.4 32.975,89.35 30.15,89.998 30.15,92.2 33.7,92.2
NetCON5_2 on Top Layer "NONET_L-01_P-001" (solid, pour order 12): 29.5,64.025 29.5,66.975 25.3,66.975 25.3,63.2 29.5,63.2
NetC11_2 on Top Layer "NONET_L-01_P-001" (solid, pour order 11): 33.325,72.1 33.325,68 32.9,67.575 32.9,64.075 35.125,64.075 35.125,72.1
Pack- on Top Layer "NONET_L-01_P-001" (solid, pour order 10): 7.85,92.15 5.9,92.15 4.725,93.325 4.725,95.775 5.2,96.25 22.5,96.25 24,94.75 24,78.8 19.175,73.975 19.175,70.05 16.95,70.05 16.95,80.05 20.6,83.7 20.6,91.025 17.675,93.95 11.475,93.95 9.7,92.175 9.425,92.175
NetQ2_5,6,7,8 on Top Layer "NONET_L-01_P-001" (solid, pour order 9): 21.008,73.4 21.013,68.85 31.813,68.85 31.818,73.4
"+5V Out" on Top Layer "NONET_L-01_P-001" (solid, pour order 4): 19.375,35.8 24,35.8 24.65,35.15 26.975,35.15 26.975,40.1 19.399,40.1
PackOUT on Top Layer "NONET_L-01_P-001" (solid, pour order 2): 25.575,30.475 29.725,30.475 30.375,31.125 33.6,31.125 33.6,31.9 34.65,31.9 34.7,31.85 34.7,27.65 25.605,27.65
NetC13_1 on Top Layer "NONET_L-01_P-001" (solid, pour order 1): 34.7,32.95 32.275,32.95 32.275,31.475 33.25,31.475 33.25,31.95 33.475,32.175 34.7,32.175
Out- on Top Layer "NONET_L-01_P-001" (solid, pour order 0): 27.55,39.125 27.55,34.625 26.575,33.65 25.475,33.65 25.475,32.225 25.525,32.175 25.6,32.25 29.875,32.25 30.3,31.825 30.325,31.85 31.8,31.85 31.8,32.875 32.1,33.175 34.725,33.175 34.7,33.2 34.7,34.1 34.325,34.475 33.575,34.475 33.575,39.125
PackOUT on Layer 2 (split plane): 151 vertices, not listed, extent 0.509,0.509 89.491,99.491
"+5V Out" on Layer 2 (split plane): 18.395,42.195 18.471,42.132 18.558,42.086 18.652,42.057 18.75,42.048 26.467,42.048 27.573,40.942 27.573,34.808 25.767,33.002 11.2,33.002 11.102,32.993 11.008,32.964 10.921,32.918 10.845,32.855 8.092,30.102 0.527,30.102 0.527,43.973 16.617,43.973
PackOUT on Layer 2 (split plane): 5,99.49 41.273,99.49 41.273,80.165 35.835,74.727 22.5,74.727 22.369,74.719 22.241,74.693 22.116,74.651 21.999,74.593 21.89,74.52 21.791,74.434 16.416,69.059 16.33,68.96 16.257,68.851 16.199,68.734 16.157,68.609 16.131,68.481 16.123,68.35 16.123,49.64 15.316,48.834 15.23,48.735 15.157,48.626 15.099,48.509 15.057,48.384 15.031,48.256 15.023,48.125 15.023,46.727 0.51,46.727 0.51,95 0.509,95.018 0.518,95.294 0.547,95.586 0.594,95.876 0.661,96.163 0.747,96.444 0.85,96.719 0.971,96.987 1.11,97.246 1.265,97.496 1.436,97.734 1.623,97.962 1.824,98.176 2.038,98.377 2.266,98.564 2.504,98.735 2.754,98.89 3.013,99.029 3.281,99.15 3.556,99.253 3.837,99.339 4.124,99.406 4.414,99.453 4.706,99.482 4.982,99.491
GND on Layer 1 (split plane): 85.294,99.482 85.586,99.453 85.876,99.406 86.163,99.339 86.444,99.253 86.719,99.15 86.987,99.029 87.246,98.89 87.496,98.735 87.734,98.564 87.962,98.377 88.176,98.176 88.377,97.962 88.564,97.734 88.735,97.496 88.89,97.246 89.029,96.987 89.15,96.719 89.253,96.444 89.339,96.163 89.406,95.876 89.453,95.586 89.482,95.294 89.491,95.018 89.49,95 89.49,5 89.491,4.982 89.482,4.706 89.453,4.414 89.406,4.124 89.339,3.837 89.253,3.556 89.15,3.281 89.029,3.013 88.89,2.754 88.735,2.504 88.564,2.266 88.377,2.038 88.176,1.824 87.962,1.623 87.734,1.436 87.496,1.265 87.246,1.11 86.987,0.971 86.719,0.85 86.444,0.747 86.163,0.661 85.876,0.594 85.586,0.547 85.294,0.518 85.018,0.509 85,0.51 5,0.51 4.982,0.509 4.706,0.518 4.414,0.547 4.124,0.594 3.837,0.661 3.556,0.747 3.281,0.85 3.013,0.971 2.754,1.11 2.504,1.265 2.266,1.436 2.038,1.623 1.824,1.824 1.623,2.038 1.436,2.266 1.265,2.504 1.11,2.754 0.971,3.013 0.85,3.281 0.747,3.556 0.661,3.837 0.594,4.124 0.547,4.414 0.518,4.706 0.509,4.982 0.51,5 0.51,21.623 47.275,21.623 47.406,21.631 47.534,21.657 47.659,21.699 47.776,21.757 47.885,21.83 47.984,21.916 50.809,24.741 50.895,24.84 50.968,24.949 51.026,25.066 51.068,25.191 51.094,25.319 51.102,25.45 51.102,39.9 51.094,40.031 51.068,40.159 51.026,40.284 50.968,40.401 50.895,40.51 50.809,40.609 47.334,44.084 47.235,44.17 47.126,44.243 47.009,44.301 46.884,44.343 46.756,44.369 46.625,44.377 22.04,44.377 16.577,49.84 16.577,78.223 37.475,78.223 37.606,78.231 37.734,78.257 37.859,78.299 37.976,78.357 38.085,78.43 38.184,78.516 43.134,83.466 43.22,83.565 43.293,83.674 43.351,83.791 43.393,83.916 43.419,84.044 43.427,84.175 43.427,99.49 85,99.49 85.018,99.491
Out- on Layer 1 (split plane): 5,99.49 41.423,99.49 41.423,84.59 37.06,80.227 15.575,80.227 15.444,80.219 15.316,80.193 15.191,80.151 15.074,80.093 14.965,80.02 14.866,79.934 14.78,79.835 14.707,79.726 14.649,79.609 14.607,79.484 14.581,79.356 14.573,79.225 14.573,49.425 14.581,49.294 14.607,49.166 14.649,49.041 14.707,48.924 14.78,48.815 14.866,48.716 20.916,42.666 21.015,42.58 21.124,42.507 21.241,42.449 21.366,42.407 21.494,42.381 21.625,42.373 46.21,42.373 49.098,39.485 49.098,25.865 46.86,23.627 0.51,23.627 0.51,95 0.509,95.018 0.518,95.294 0.547,95.586 0.594,95.876 0.661,96.163 0.747,96.444 0.85,96.719 0.971,96.987 1.11,97.246 1.265,97.496 1.436,97.734 1.623,97.962 1.824,98.176 2.038,98.377 2.266,98.564 2.504,98.735 2.754,98.89 3.013,99.029 3.281,99.15 3.556,99.253 3.837,99.339 4.124,99.406 4.414,99.453 4.706,99.482 4.982,99.491

## Other copper
Layer 1 (plane layer: these items are gaps in the copper):
  lines w2: 0.15,22.625 47.275,22.625 50.1,25.45 50.1,39.9 46.625,43.375 21.625,43.375 15.575,49.425 15.575,79.225 37.475,79.225 42.425,84.175 42.425,99.525
Layer 2 (plane layer: these items are gaps in the copper):
  lines w1: 0.025,29.6 0.025,44.475 3.5,44.475 16.825,44.475 18.75,42.55 26.675,42.55 28.075,41.15 28.075,34.6 25.975,32.5 11.2,32.5 8.3,29.6 0.025,29.6
  lines w2: 0.5,45.725 16.025,45.725 16.025,48.125 17.125,49.225 17.125,68.35 22.5,73.725 36.25,73.725 42.275,79.75 42.275,99.5

## Silkscreen, mask and mechanical layers (free items; w line width, h text height)
Top Overlay:
  lines w0.25: 74.125,63.925 74.125,45.7 ; 74.125,45.7 76.95,45.7 76.95,63.95 74.1,63.95 68.5,63.95 68.5,45.7 74.125,45.7
Bottom Overlay:
  text "ON/OFF" at 29.375,96.725 h0.8 r180
  text "P-" at 14.375,94.425 h1.25 r270
  text "11.1V" at 21.475,93.625 h1.25 r270
  text "3.7V" at 54.45,93.3 h1.25 r270
  text "P+" at 9.8,82.425 h1.25 r270
  text "+" at 4.383,73.2 h1.3 r270
  text "+12V" at 9.95,70.925 h0.8 r270
  text "GND" at 9.95,64.7 h0.8 r270
  text "-" at 4.375,63.95 h1.3 r270
  text "GND" at 3.05,59.6 h0.8 r270
  text "+12V" at 5.575,59.6 h0.8 r270
  text "GND" at 3.015,44.075 h0.8 r270
  text "+5V" at 5.54,44.075 h0.8 r270
  text "0V" at 74.8,2.65 h1.25 r270
  text "7.4V" at 43.85,1.725 h1.25 r270
Board Shape:
  the board outline again, w0.15
Fab Notes:
  text "1. Board Thickness - 1.6mm / 2. Board Dimensions - 90mm*100mm / 3. 4 - Layer Construction - 35um / 4. Plating Thickness minimum - 25um / 5. Solder Mask - Green Colour / 6. Board has to be hot air levelled / 7. Print Legend in White Colour" at 104,83 h2

## Dimensions
5,100 to 5,0 on Dimensions
0,5 to 90,5 on Dimensions